# Altium PCB pay-ssm.PcbDoc (part 2 of 3)
Units mm, origin at the board's own origin, x right, y up, seen from the top; angles counter-clockwise.
Board outline 128 x 54 mm, 4 copper layers (Top Layer, GND, VCC, Bottom Layer), stack 0.778 mm thick; 199 components, 184 nets, 851 pads, 416 vias.
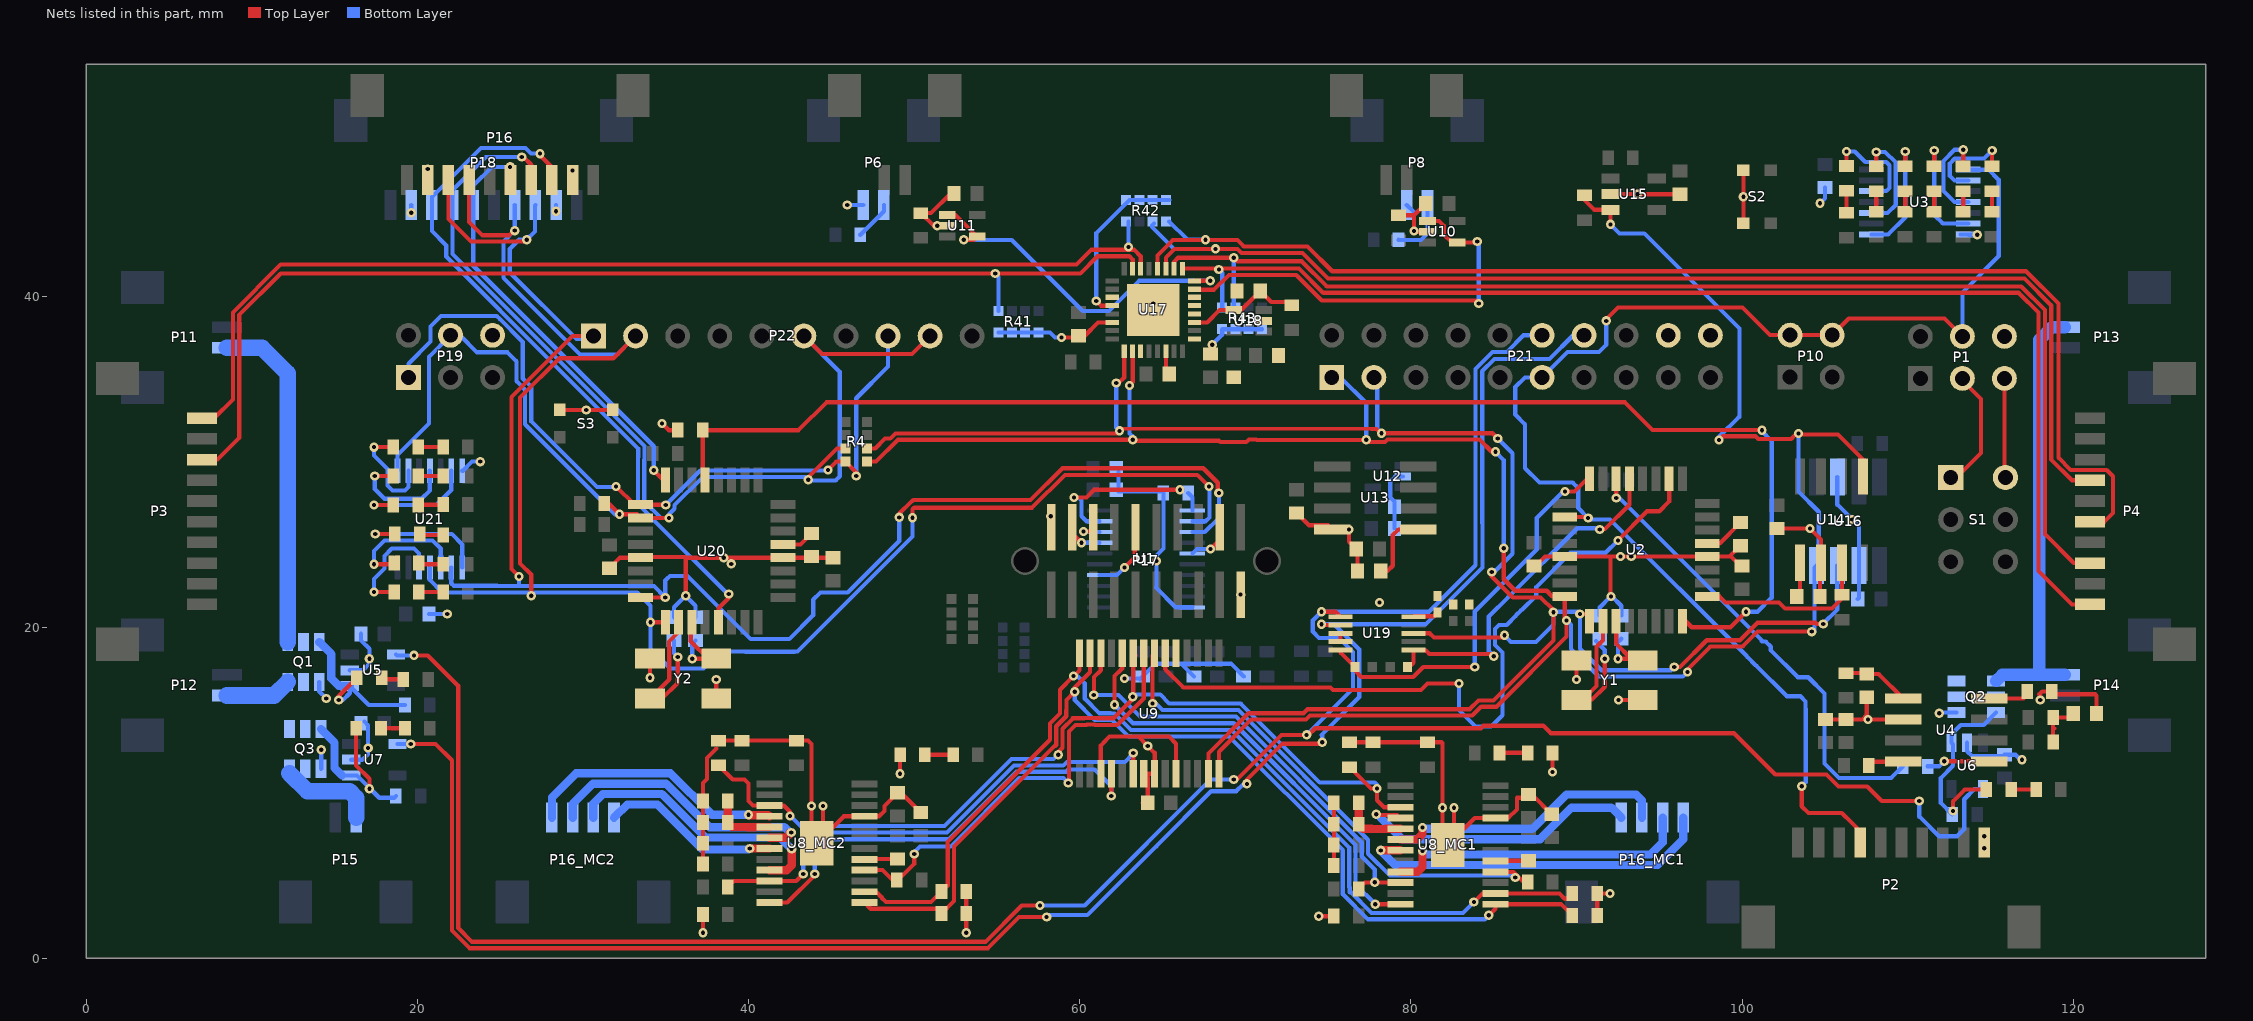
[diagram p4: the nets of this part, all layers, seen from the top]

## Via types
v1: diameter 0.559, hole 0.254, Top Layer to Bottom Layer, 376 vias
v2: diameter 1.5, hole 1.1, Top Layer to Bottom Layer, 32 vias
v3: diameter 6, hole 3.6, Top Layer to Bottom Layer, 8 vias

## Nets (pads, with @x,y where several pads share a name; then routed paths per layer and width w, separated by ;. In a path a pad name is that pad's centre, name@x,y a point inside that pad or via, vN(x,y) a via of type N, cw(c..) or ccw(c..) an arc to the next point about the centre after c; other vN are vias at no path point) (continued)
CH3: P3.8 R41.5 U17.15 | length 68.3
  Top Layer w0.254: P3.8@7,30.125 7.925,30.125 9.238,31.438 9.238,38.854 11.749,41.365 v1(54.9,41.365) 60.035,41.365 61.07,42.4 62.995,42.4 63.195,42.2 U17.15@63.195,41.655
  Bottom Layer w0.254: R41.5@55.1,39.1 55.1,41.165
CH4: P3.10 R42.8 U17.14 | length 66.6
  Top Layer w0.254: P3.10@7,32.625 7.736,32.625 8.857,33.746 8.857,39.012 11.743,41.899 59.81,41.899 60.712,42.8 v1@62.943,42.8 ; v1(62.943,42.957) v1@62.943,42.8 ; U17.14@63.677,41.655 63.677,42.4 63.277,42.8 v1@62.943,42.8
  Bottom Layer w0.254: v1(62.943,42.957) R42.8@62.943,44.5
CH6: P4.6 R42.5 U17.12 | length 76.7
  Top Layer w0.254: U17.12@64.693,41.655 64.693,42.454 65.621,43.382 69.526,43.382 69.908,43 73.75,43 75.25,41.5 76.6,41.5 117.141,41.5 119.1,39.541 119.1,30.24 119.84,29.5 122.018,29.5 122.4,29.118 122.4,26.9 121.875,26.375 P4.6@121,26.375
  Bottom Layer w0.254: R42.5@65.4,44.5 66.496,43.404 66.492,43.4 v1(67.593,43.4)
CH7: P4.4 R42.6 U17.11 | length 72.6
  Top Layer w0.254: U17.11@65.201,41.655 65.201,42.317 65.732,42.849 v1(68.2,42.849) 69.521,42.849 69.769,42.6 73.445,42.6 74.995,41.05 117.052,41.05 118.662,39.441 118.662,30.131 119.918,28.875 P4.4@121,28.875
  Bottom Layer w0.254: R42.6@64.48,44.38 64.361,44.261 64.361,44.174 65.687,42.849 v1(68.2,42.849)
CH8: P4.8 R43.6 U17.10 | length 74.5
  Top Layer w0.254: U17.10@65.684,41.655 65.684,42.065 65.934,42.315 v1(69.3,42.315) 69.515,42.1 73.4,42.1 74.919,40.581 76,40.581 116.858,40.581 118.281,39.158 118.281,25.619 120.025,23.875 P4.8@121,23.875
  Bottom Layer w0.254: v1(69.3,42.315) 69.3,39.4 R43.6@69.4,39.3
CH9: P4.10 R43.5 U17.9 | length 74.7
  Top Layer w0.254: U17.9@66.192,41.655 73.245,41.655 74.7,40.2 76,40.2 116.7,40.2 117.9,39 117.9,23.4 119.925,21.375 P4.10@121,21.375
  Bottom Layer w0.254: v1(68.4,41.6) 68.6,41.4 R43.5@68.6,39.3
CH10: U11.1 U11.4 U17.8 | length 21.6
  Top Layer w0.254: U11.1@52,44.9 52.5,44.9 U11.4@53.8,43.6 53.6,43.4 v1(53,43.4) ; U17.8@66.928,40.918 v1(67.882,40.918)
  Bottom Layer w0.254: v1(53,43.4) 53.011,43.389 55.889,43.389 60.178,39.1 61.764,39.1 63.582,40.918 v1(67.882,40.918)
CH11: U10.1 U10.4 U17.7 | length 25.9
  Top Layer w0.254: U17.7@66.928,40.41 66.954,40.385 68.115,40.385 69.004,41.274 73.072,41.274 74.615,39.731 83.925,39.731 v1(84.1,39.555) ; U10.1@81,44.528 81.7,44.528 81.977,44.251 81.977,43.723 82.472,43.228 U10.4@82.8,43.228 83.928,43.228 v1(84,43.3)
  Bottom Layer w0.254: v1(84,43.3) 84.1,43.2 v1(84.1,39.555)
CLKIN: P17.17 U1.5 | length 2.7
  Top Layer w0.254: v1(67.9,24.721) 68.445,25.266 P17.17@68.445,26.032
  Bottom Layer w0.254: U1.5@66.8,24.45 67.071,24.721 v1(67.9,24.721)
DAC_A: P21.12 U5.4 U6.4 U19.1 | length 161.6
  Top Layer w0.254: v1(19.8,18.3) 20.624,18.3 22.464,16.46 22.464,1.836 23.3,1 54.3,1 56.5,3.2 v1(57.6,3.2) ; v1(69.3,10.8) 69.319,10.8 69.4,10.719 72.181,13.5 v1(73.7,13.5) 73.819,13.5 74.219,13.9 84.234,13.9 84.39,14.056 87.991,14.056 88.447,13.6 99.5,13.6 102,11.1 105.092,11.1 105.811,10.381 107.558,10.381 108.433,9.506 v1@110.7,9.506 ; v1(74.6,20.933) 75.449,20.933 U19.1@75.75,20.632
  Bottom Layer w0.254: U5.4@18.716,18.349 18.764,18.3 v1(19.8,18.3) ; v1(57.6,3.2) 60.3,3.2 67.9,10.8 v1(69.3,10.8) ; v1(73.7,13.5) 76.5,16.3 76.5,18.5 75.648,19.352 74.448,19.352 74.067,19.733 74.067,20.4 v1(74.6,20.933) 81.095,20.933 83.9,23.739 83.9,35.6 84.925,36.625 85.796,36.625 86.8,37.629 P21.12@87.92,37.629 ; v1(110.7,9.5) 110.7,8.56 111.885,7.375 112.975,7.375 113.41,7.81 113.41,9.61 114.025,10.225 U6.4@114.538,10.225
DAC_B: P21.14 U7.4 U19.2 | length 112.6
  Top Layer w0.254: v1(19.6,12.95) 21.1,12.95 22.083,11.967 22.083,1.678 23.142,0.619 54.458,0.619 56.339,2.5 v1(58,2.5) ; v1(70.091,10.541) 70.091,10.809 72.248,12.967 74.556,12.967 v1(74.639,13.05) ; v1(74.6,20.174) 74.483,20.174 74.442,20.132 U19.2@75.75,20.132
  Bottom Layer w0.254: U7.4@18.8,12.95 v1(19.6,12.95) ; v1(58,2.5) 58,2.619 60.458,2.619 64.597,6.759 64.635,6.759 64.635,6.796 67.939,10.1 69.453,10.1 69.893,10.541 v1(70.091,10.541) ; v1(74.6,20.174) 75.458,20.174 ; v1(74.639,13.05) 74.639,13.461 74.6,13.5 76.881,15.781 76.881,18.658 75.458,20.081 75.458,20.174 ; P21.14@90.46,37.629 89.804,37.629 88.375,36.2 85.039,36.2 84.3,35.461 84.3,26.293 84.314,26.279 84.314,23.614 80.874,20.174 75.458,20.174
DAC_C\L\R\: R47.1 U2.32 U19.5 | length 24
  Top Layer w0.254: U19.5@75.75,18.632 75.75,18.462 R47.1@76.613,17.6 76.613,17.387 77,17 80.14,17 80.74,17.6 v1(83.852,17.6) ; v1(89.3,28.2) 89.877,28.2 ; 89.877,28.2 90.717,29.04 U2.32@90.793,28.965
  Bottom Layer w0.254: v1(83.852,17.6) 83.852,20.952 87.6,24.7 87.6,26.6 89.2,28.2 v1(89.3,28.2)
DAC_C\S\: R46.1 U2.29 U19.6 | length 22
  Top Layer w0.254: R46.1@79.8,17.6 79.901,17.6 80.15,17.849 U19.6@80.15,18.632 80.861,18.632 81.111,18.382 85.106,18.382 85,18.276 v1(85,18.247) ; v1@91.375,25.925 91.725,25.925 93.193,27.393 U2.29@93.193,28.965
  Bottom Layer w0.254: v1(85,18.247) 84.7,18.547 84.7,20.651 85.882,21.833 85.895,21.833 90.04,25.979 91.345,25.979 91.4,25.924 v1(91.4,25.9)
DATA_RDY: R51.2 U2.16 U20.29 | length 85.1
  Top Layer w0.254: U20.29@37.379,28.9 37.227,29.052 R51.2@37.227,31.9 43.019,31.9 44.7,33.581 92.919,33.581 94.586,31.914 101.186,31.914 v1(101.2,31.9) ; U2.16@96.393,20.365 96.594,20.365 96.959,20 99.3,20 v1(100.233,20.933)
  Bottom Layer w0.254: v1(100.233,20.933) 100.933,20.933 101.784,21.784 101.784,31.25 101.2,31.835 v1(101.2,31.9) v1@101.2,31.915
DECAY: R30_MC1.2 R30_MC2.2 U8_MC1.3 U8_MC2.3 U9.23 | length 55.9
  Top Layer w0.254: R30_MC2.2@38.194,11.656 39.044,10.806 39.747,10.806 39.997,10.556 39.997,9.506 40.272,9.231 U8_MC2.3@41.257,9.231 42.125,9.231 42.5,8.856 v1(42.5,8.6) ; v1(58.7,12.3) 58.7,12.461 58.962,12.723 58.962,13.865 59.562,14.465 59.562,14.5 60.269,14.5 60.284,14.514 61.041,14.514 61.056,14.5 62.035,14.5 63.2,15.665 v1(63.2,15.8) ; U9.23@63.228,18.418 63.358,18.288 63.228,18.157 63.228,17.127 63.233,17.121 v1@63.233,15.8 ; R30_MC1.2@76.294,11.55 77.589,10.256 v1(77.944,10.256) 77.944,9.553 78.372,9.125 U8_MC1.3@79.357,9.125
  Bottom Layer w0.254: v1(42.5,8.6) 42.538,8.6 43.138,8 51.839,8 55.873,12.034 58.418,12.034 58.684,12.3 v1(58.7,12.3) ; v1(63.2,15.8) 63.333,15.933 64.867,15.933 65.4,15.4 69.716,15.4 74.487,10.629 77.817,10.629 77.944,10.501 v1(77.944,10.256)
DIR_A: U8_MC1.12 U9.24 | length 27
  Top Layer w0.254: v1(62.1,15.319) 62.1,15.985 62.095,15.98 62.095,17.049 62.479,17.433 62.487,17.433 62.567,17.513 U9.24@62.567,18.418 ; v1(77.841,3.275) U8_MC1.12@79.357,3.275
  Bottom Layer w0.254: v1(62.1,15.319) 63.219,14.2 69.3,14.2 76.649,6.851 76.649,4.468 v1(77.841,3.275)
DIR_B: U8_MC2.12 U9.4 | length 27.1
  Top Layer w0.254: U8_MC2.12@41.257,3.381 42.335,3.381 44,5.046 v1(44,5.1) ; v1(61.907,9.807) U9.4@61.907,11.154
  Bottom Layer w0.254: v1(44,5.1) 44,6.35 44.85,7.2 52.116,7.2 56.188,11.272 59.165,11.272 59.293,11.4 60.9,11.4 61.907,10.393 v1(61.907,9.807)
E\N\_A: R23_MC1.1 U8_MC1.10 U9.26 | length 28.2
  Top Layer w0.254: v1(60.839,15.9) 60.839,15.794 60.867,15.767 60.867,16.994 61.272,17.399 U9.26@61.272,18.418 ; R23_MC1.1@76.85,4.2 77.225,4.575 U8_MC1.10@79.357,4.575
  Bottom Layer w0.254: v1(60.839,15.9) 62.346,15.9 63.646,14.6 69.439,14.6 77.03,7.009 77.03,6.16 77.817,5.374 v1(77.817,4.6)
E\N\_B: R23_MC2.1 U8_MC2.10 U9.6 | length 29.7
  Top Layer w0.254: R23_MC2.1@38.75,4.306 39.125,4.681 U8_MC2.10@41.257,4.681 42.881,4.681 v1(43.3,5.1) ; U9.6@63.228,11.154 v1(63.228,12.4)
  Bottom Layer w0.254: v1(43.3,5.1) 43.3,6.2 44.7,7.6 51.978,7.6 56.03,11.653 59.007,11.653 59.221,11.867 62.721,11.867 63.228,12.374 v1(63.228,12.4)
F\L\T\_A: R20_MC1.1 U8_MC1.16 U9.21 | length 32.4
  Top Layer w0.254: v1(64.4,15.4) 64.4,18.295 U9.21@64.523,18.418 ; U8_MC1.16@85.097,5.225 86.187,5.225 v1@86.412,5 ; v1(86.3,4.888) v1@86.412,5 ; v1@86.412,5 R20_MC1.1@86.794,4.619 ; R20_MC1.1@86.794,4.619 R20_MC1.1@87.05,4.619 R20_MC1.1@86.794,4.619
  Bottom Layer w0.254: v1(64.4,15.4) 64.6,15.4 65,15 69.578,15 77.411,7.167 77.411,6.318 78.729,5 86.188,5 v1(86.3,4.888)
F\L\T\_B: R20_MC2.1 U8_MC2.16 U9.22 | length 26.9
  Top Layer w0.254: U8_MC2.16@46.997,5.331 48.087,5.331 48.694,4.725 R20_MC2.1@48.95,4.725 49.025,4.725 50,5.7 v1(50,6.3) ; v1(59.3,10.6) 59.343,10.6 59.343,13.708 59.735,14.1 60.408,14.1 60.442,14.133 60.883,14.133 60.917,14.1 62.267,14.1 63.863,15.695 U9.22@63.863,18.418
  Bottom Layer w0.254: v1(50,6.3) 50,6.4 50.359,6.759 52.214,6.759 56.346,10.891 59.009,10.891 v1(59.3,10.6)
GND: C1.1 C2.1 C4.1 C5.1 C6.2 C7.1 C8.1 C9.1 C10.1 C11.1 C12.1 C13.2 C14.2 C15.2 C16_MC1.1 C16_MC2.1 C18_MC1.1 C18_MC2.1 C19.1 C20.1 C21.1 C22.1 C23.1 C24.1 C25.1 C26.1 C27.1 C28.1 C29.1 C30.1 C31.1 C32.1 C33.1 C34.1 C35.1 C36.1 C37.1 C38.1 C39.2 C42.1 C43.1 C44.1 C45.1 C62.1 C63.1 C64.2 D18_MC1.2 D18_MC2.2 P1.6 P2.1 P6.2 P8.2 P16.2 P16.9 P17.1 P17.20 P18.2 P18.9 P19.6 P21.18 P21.20 Q1.4 Q2.4 Q3.4 R3.1 R16.1 R21_MC1.1 R21_MC2.1 R22_MC1.1 R22_MC2.1 R24_MC1.1 R24_MC2.1 R25_MC1.1 R25_MC2.1 R26_MC1.1 R26_MC2.1 R27_MC1.1 R27_MC2.1 R28_MC1.1 R28_MC2.1 R29_MC1.1 R29_MC2.1 R30_MC1.1 R30_MC2.1 R31_MC1.1 R31_MC2.1 R35.1 R37.1 R39.1 R40.1 R41.1 R41.2 R41.3 R41.4 R42.1 R42.2 R42.3 R42.4 R43.1 R43.2 R43.3 R43.4 R44.2 R51.1 S2.2 S3.2 U1.10 U2.5 U2.20 U3.7 U4.2 U5.2 U6.2 U7.2 U8_MC1.21 U8_MC1.25 U8_MC2.21 U8_MC2.25 U9.3 U9.7 U9.8 U9.10 U10.2 U11.2 U12.2 U13.4 U14.2 U15.2 U16.2 U16.6 U17.1 U17.4 U17.5 U17.6 U17.19 U17.20 U17.22 U17.27 U17.30 U17.33 U18.2 U19.3 U19.4 U20.5 U20.20 U21.7 Y1.2 Y1.4 Y2.2 Y2.4 | length 245.5
  Top Layer w0.254: P16.2@20.625,47 v1(20.625,47.675) ; S3.2@28.6,33.125 v1(30.2,33.125) S3.2@31.8,33.125 ; P16.9@29.375,47 v1(29.375,47.575) ; C37.1@31.6,23.565 32.235,24.2 U20.5@33.479,24.2 33.513,24.233 36.167,24.233 36.2,24.2 ; v1(34.052,16.952) Y2.4@34.052,18.1 ; v1(34.777,32.3) 35.177,31.9 R51.1@35.728,31.9 ; v1(36.2,21.9) 36.2,24.2 ; v1(37.25,1.55) R29_MC2.1@37.25,2.657 ; R25_MC2.1@37.25,5.706 R26_MC2.1@37.25,6.956 R24_MC2.1@37.25,8.206 R27_MC2.1@37.25,9.506 37.25,10.6 37.49,10.84 37.49,12.111 38.052,12.673 ; Y2.2@38.052,15.7 v1(38.052,16.843) ; R30_MC2.1@38.194,13.156 R31_MC2.1@42.9,13.156 ; R31_MC2.1@42.9,13.156 43.594,13.156 43.8,12.95 v1(43.8,9.206) 43.8,7.484 44.497,8.181 v1(44.497,9.206) ; U8_MC2.25@44.127,6.956 45.752,8.581 U8_MC2.21@46.997,8.581 47.881,8.581 48.2,8.9 48.2,9.206 C18_MC2.1@49,10.006 49.2,10.006 C16_MC2.1@50.4,8.806 ; C38.1@45.1,24.2 U20.20@42.079,24.2 v1(38.5,24.2) 36.2,24.2 ; v1(49.15,11.15) D18_MC2.2@49.15,12.3 ; U11.2@52,44.25 v1(51.4,44.25) 51.161,44.25 R44.2@50.4,45.011 51.017,45.011 52.206,46.2 C21.1@52.4,46.2 ; v1(53.15,1.55) R21_MC2.1@53.15,2.7 R22_MC2.1@53.15,4.031 ; v1(58.9,37.5) 59.825,37.5 C33.1@59.925,37.6 60.3,37.6 61.104,38.404 U17.22@61.95,38.403 ; v1(61,39.7) 61.28,39.42 U17.20@61.95,39.419 ; U9.3@61.272,11.154 61.266,11.16 61.266,12.85 61.396,12.979 61.396,12.996 61.8,13.4 63.537,13.4 ; C19.1@63.8,9.4 64.1,9.7 64.1,10.917 U9.7@63.863,11.154 U9.8@64.523,11.154 64.523,12.414 v1(64.104,12.833) 63.537,13.4 ; v1(64.439,38.939) U17.33@64.439,39.165 v1(64.439,39.555) ; U17.30@65.201,36.676 65.201,35.599 C31.1@65.5,35.3 ; U9.10@65.819,11.154 65.819,12.962 65.381,13.4 63.537,13.4 ; C24.1@73.1,26.9 73.842,26.158 74.986,26.158 U13.4@75.241,25.902 v1(76.262,25.902) 76.262,25.159 C26.1@76.7,24.721 76.769,24.652 C25.1@76.769,23.4 ; v1(74.426,2.551) R29_MC1.1@75.35,2.551 ; R25_MC1.1@75.35,5.6 R26_MC1.1@75.35,6.85 R24_MC1.1@75.35,8.1 R27_MC1.1@75.35,9.4 ; U19.4@75.75,19.132 U19.3@75.75,19.632 ; R30_MC1.1@76.294,13.05 R31_MC1.1@81,13.05 ; R40.1@79.256,44.878 80.178,44.878 ; R31_MC1.1@81,13.05 81.85,13.05 81.9,13 v1(81.9,9.1) 81.9,7.378 82.597,8.075 v1(82.597,9.1) ; U10.2@81,43.878 80.222,43.878 v1(80.178,43.922) 80.178,44.878 ; C20.1@81.091,45.6 C20.1@80.9,45.6 80.178,44.878 ; U8_MC1.25@82.227,6.85 83.852,8.475 U8_MC1.21@85.097,8.475 85.871,8.475 86.396,9 86.396,9.704 87.1,9.704 C18_MC1.1@87.1,9.9 87.3,9.9 C16_MC1.1@88.5,8.7 ; C4.1@87.4,23.9 87.736,23.9 88.1,24.265 U2.5@89.293,24.265 92.05,24.265 ; v1(88.55,11.25) D18_MC1.2@88.55,12.4 ; v1(90,16.843) Y1.4@90,18 ; R21_MC1.1@91.25,2.594 R22_MC1.1@91.25,3.925 v1(92.023,3.925) ; U15.2@92.048,46.156 93.681,46.156 v1(93.688,46.149) C29.1@96.256,46.149 ; v1(92.075,21.85) 92.05,21.875 92.05,24.265 ; v1(92.53,15.6) Y1.2@94,15.6 ; C5.1@99.9,23.7 99.335,24.265 99.246,24.265 ; C6.2@99.9,24.919 99.246,24.265 ; S2.2@100.075,47.6 v1(100.075,46) 100.075,44.4 S2.2@100.1,44.4 ; C27.1@102.1,25.965 v1(104.094,25.965) 104.759,25.3 U14.2@104.759,23.9 104.7,23.841 C28.1@104.7,21.85 ; C9.1@105.027,14.431 C10.1@106.277,14.431 107.269,14.431 107.527,14.69 C12.1@107.527,15.774 ; v1(107.6,14.431) 109.717,14.431 U4.2@109.727,14.421 ; v1(114.625,6.656) v1(114.625,7.375) ; v1(118,15.6) 118,15.892 117.946,15.946 118.119,16.119 R16.1@118.708,16.119 118.882,15.946 121.319,15.946 121.4,15.865 C11.1@121.4,14.8 ; 92.05,24.265 v1(92.659,24.265) v1(93.302,24.265) U2.20@97.893,24.265 99.246,24.265
  Bottom Layer w0.254: Q1.4@14.075,16.7 14.075,16.125 v1(14.5,15.7) ; Q3.4@14.175,11.45 14.2,11.475 v1(14.2,12.6) ; U5.2@15.916,17.398 16.698,17.398 17.1,17.8 v1(17.1,18.1) 17.1,18.7 16.6,19.2 C13.2@16.6,19.6 ; U7.2@16,12 16.7,12 17.025,12.325 v1(17.025,12.7) 17.025,14.075 C14.2@16.8,14.3 ; v1(19.625,45.033) P18.9@19.625,45.5 ; C43.1@20.7,20.8 v1(21.8,20.8) ; U21.7@22.706,29.446 22.746,29.446 23.3,30 v1(23.8,30) ; v1(28.375,45.114) P18.2@28.375,45.5 ; C44.1@35.503,20.6 35.503,21.203 v1(36.2,21.9) 36.802,21.298 C45.1@36.802,20.6 ; v1(45.96,45.5) P6.2@46.92,45.5 ; R41.4@55.1,37.8 R41.3@55.9,37.8 R41.2@56.7,37.8 R41.1@57.5,37.8 58.2,37.8 58.5,37.5 v1(58.9,37.5) ; v1(61,39.7) 61,43.8 63,45.8 R42.2@63.6,45.8 R42.3@64.4,45.8 R42.4@65.2,45.8 R42.4@65.4,45.8 ; C2.1@62.339,29.5 62.339,28.2 64.95,28.2 R3.1@65.05,28.1 65.05,24.75 64.6,24.3 64.635,24.265 v1(64.635,24) 64.635,22.435 64.6,22.4 65.8,21.2 U1.10@66.8,21.2 ; v1(62.7,16.9) 63.6,16.9 63.638,16.862 R35.1@63.8,17.025 64.575,17.8 66.125,17.8 ; R37.1@66.9,17.025 66.125,17.8 ; v1(68,37.064) 68.6,37.664 R43.4@68.6,38 R43.3@69.4,38 R43.2@70.2,38 R43.1@71,38 ; R39.1@69.9,17.025 69.125,17.8 66.125,17.8 ; C23.1@79,25.965 C22.1@79,27.274 79,27.6 78.746,27.854 78.746,28.796 79.056,29.106 U12.2@79.5,29.106 ; P8.2@79.75,45.5 80.178,45.072 v1(80.178,43.922) v1@80.2,43.9 ; C8.1@91.4,20.7 91.4,21.2 92.05,21.85 v1(92.075,21.85) 92.15,21.85 92.7,21.3 C7.1@92.7,20.7 ; v1(104.7,45.6) 105,45.9 C42.1@105,46.55 ; U16.2@105.75,29.075 105.75,27.4 v1(106.65,26.5) 107.05,26.1 U16.6@107.05,23.725 107.05,21.769 C30.1@106.981,21.7 ; v1(111.9,14.8) 111.95,14.85 Q2.4@112.938,14.85 ; U3.7@113.183,43.719 U3.7@113.65,43.719 113.669,43.7 v1(114.204,43.7) ; U6.2@113.588,13.025 113.588,12.512 113.879,12.221 115.769,12.221 C15.2@115.848,12.3 116.5,12.3 116.8,12 v1(116.9,12)
  other v1: 78.1,21.5 69.715,21.968 38.959,23.826 58.25,26.7
HM_C\S\: R45.1 U2.17 U14.3 | length 10.9
  Top Layer w0.254: U2.17@97.893,21.865 98.635,21.865 99.002,21.498 102.234,21.498 102.6,21.132 105.432,21.132 106.029,21.729 R45.1@106.029,21.95 U14.3@106.029,23.9
INTA: U2.26 U9.20 | length 45.1
  Top Layer w0.254: U9.20@65.158,18.418 65.158,17.463 66.255,16.366 ; 66.256,16.366 75.134,16.366 75.3,16.2 80.6,16.2 81,16.6 v1(82.9,16.6) ; v1(92.5,25.244) 94.256,27 95,27 95.593,27.593 U2.26@95.593,28.965
  Bottom Layer w0.254: v1(82.9,16.6) 82.9,15 83.9,14 84.85,14 85.533,14.684 85.533,18.467 85.081,18.92 85.081,19.9 85.313,20.132 85.786,20.132 86.352,20.698 86.352,20.721 86.665,21.033 86.688,21.033 87.572,21.918 87.572,22.433 89.639,24.5 91.756,24.5 v1(92.5,25.244)
INTB: U9.19
LBK: R14.2 U2.30 | length 28.4
  Top Layer w0.254: v1(92.393,27.807) U2.30@92.393,28.965
  Bottom Layer w0.254: v1(92.393,27.807) 92.593,27.807 101.172,19.228 101.172,19.167 101.205,19.133 101.421,19.133 101.733,18.821 101.733,18.606 103.362,16.976 103.994,16.976 104.981,15.99 104.981,11.769 105.85,10.9 109,10.9 R14.2@109.7,11.6
LED_CLK: P16.7 P18.7 P19.4 P22.6 P22.9 R4.7 R22.1 U20.2 U21.1 | length 95.4
  Top Layer w0.254: v1(26.3,48.4) 26.4,48.4 26.875,47.925 P16.7@26.875,47 ; R22.1@31.296,27.465 31.556,27.465 v1(32.2,26.821) 33.258,26.821 U20.2@33.479,26.6 v1(35.2,26.6) ; P22.6@43.34,37.588 44.428,36.5 49.872,36.5 P22.9@50.96,37.588 ; v1(43.6,28.9) 43.6,29.043 43.594,29.048 45.346,30.8 R4.7@45.85,30.8
  Bottom Layer w0.254: U21.1@18.794,29.446 18.794,30.394 20.7,32.3 20.7,36.329 P19.4@22,37.629 22.571,37.629 23.6,36.6 25.439,36.6 25.981,36.058 25.981,34.858 26.5,34.339 26.5,32.261 31.94,26.821 v1(32.2,26.821) ; v1(26.3,48.4) 24.133,48.4 22.125,46.392 P18.7@22.125,45.5 22.125,42.542 33.714,30.952 33.714,30.121 33.7,30.107 33.7,27.6 34.7,26.6 v1(35.2,26.6) 35.2,26.821 35.533,27.154 35.533,27.37 37.24,29.076 43.424,29.076 v1(43.6,28.9) 43.633,28.867 45.26,28.867 45.506,29.112 45.506,35.422 P22.6@43.34,37.588
LED_PEX_C\S\: P16.6 P18.6 U20.32 | length 25.3
  Top Layer w0.254: v1(34.275,29.475) 34.85,28.9 U20.32@34.979,28.9
  Bottom Layer w0.254: v1(25.6,47.8) 24.5,47.8 23.375,46.675 P18.6@23.375,45.5 23.375,41.83 34.275,30.93 v1(34.275,29.475)
LED_PEX_R\S\T\: P16.8 P18.8 U20.13 | length 43.3
  Top Layer w0.254: v1(27.4,48.6) 27.3,48.6 28.125,47.775 P16.8@28.125,47 ; U20.13@38.179,20.3 38.179,21.145 38.8,21.766 v1(38.8,22)
  Bottom Layer w0.254: v1(27.4,48.6) 26.854,48.6 26.521,48.933 23.833,48.933 20.875,45.975 P18.8@20.875,45.5 20.875,43.925 21.744,43.056 21.744,42.384 24.944,39.184 24.944,39.181 25.111,39.014 25.114,39.014 33.333,30.794 33.333,30.279 33.319,30.265 33.319,27.442 34.3,26.461 34.3,26.446 38.746,22 v1(38.8,22)
M0: R21_MC1.2 R21_MC2.2 U8_MC1.13 U8_MC2.13 U9.27 | length 62.8
  Top Layer w0.254: U8_MC2.13@46.997,3.381 47.378,3 51.35,3 R21_MC2.2@51.65,2.7 52.41,3.46 52.41,6.764 58.479,12.833 58.533,12.833 58.581,12.881 58.581,14.023 59.181,14.623 59.181,14.981 59.2,15 59.2,15.6 v1(59.7,16.1) 59.7,16.366 60.612,17.277 U9.27@60.612,18.418 ; v1(84.7,2.6) 85.097,2.997 U8_MC1.13@85.097,3.275 89.069,3.275 R21_MC1.2@89.75,2.594
  Bottom Layer w0.254: v1(59.7,16.1) 59.7,15.6 60.9,14.4 61.941,14.4 62.903,13.438 62.923,13.438 62.942,13.419 63.076,13.419 63.095,13.4 69.022,13.4 75.887,6.535 75.887,3.874 77.4,2.361 84.461,2.361 v1(84.7,2.6)
M1: R22_MC1.2 R22_MC2.2 U8_MC1.14 U8_MC2.14 U9.28 | length 61.9
  Top Layer w0.254: U8_MC2.14@46.997,4.031 47.696,4.031 48.036,3.691 48.036,3.664 48.3,3.4 51.019,3.4 R22_MC2.2@51.65,4.031 52.029,4.41 52.029,6.861 52.019,6.871 52.019,7.025 58.2,13.206 58.2,14.181 58.8,14.781 58.8,16.221 v1(59.628,17.049) 59.977,17.398 U9.28@59.977,18.418 ; v1(83.8,3.4) 84.315,3.915 88.968,3.915 89.283,3.6 89.425,3.6 R22_MC1.2@89.739,3.915 ; R22_MC1.2@89.739,3.915 R22_MC1.2@89.75,3.925 R22_MC1.2@89.739,3.915
  Bottom Layer w0.254: v1(59.628,17.049) 59.851,17.049 60.306,16.594 60.306,15.679 61.185,14.8 61.865,14.8 61.879,14.786 62.095,14.786 63.061,13.819 63.081,13.819 63.1,13.8 69.161,13.8 76.268,6.693 76.268,4.31 76.3,4.278 76.3,4 76.362,4 77.62,2.742 83.142,2.742 v1(83.8,3.4)
MISO: P21.1 R4.1 R55.2 U2.8 U9.14 U14.5 U15.3 U16.8 U17.26 | length 151.3
  Top Layer w0.254: R4.1@47.15,30 47.7,30 49.024,31.324 v1(63.2,31.324) 63.268,31.256 68.41,31.256 68.485,31.181 70.06,31.181 70.212,31.333 70.654,31.333 70.683,31.304 77.128,31.304 77.251,31.181 78.435,31.181 78.588,31.333 79.918,31.333 79.921,31.33 80.679,31.33 80.682,31.333 84.147,31.333 84.881,30.6 v1(85.1,30.6) ; v1@63.195,34.8 U17.26@63.195,36.676 ; U9.14@68.409,11.154 68.409,12.478 70.352,14.421 73.663,14.421 73.903,14.662 83.703,14.662 84.24,15.199 85.165,15.199 89.4,19.433 v1(89.4,20.4) 89.293,20.507 U2.8@89.293,21.865 88.535,21.865 88.2,22.2 86.3,22.2 85.605,22.895 85.605,23.295 85.6,23.3 v1(85.6,24.77) ; v1@77.15,31.333 77.16,31.324 v1(77.3,31.324) ; R55.2@90.481,46.074 90.481,45.8 91.075,45.206 U15.3@92.048,45.206 v1(92.048,44.328) ; v1(96.7,17.3) 96.7,17.454 98.079,18.833 100.033,18.833 100.933,19.733 v1(104.199,19.733) ; v1(98.6,31.3) 98.833,31.533 100.812,31.533 100.979,31.367 102.965,31.367 v1@103.2,31.601 ; v1@103.232,31.633 105.794,31.633 107.299,30.128 U14.5@107.299,29.1
  Bottom Layer w0.254: v1(63,34.6) 63,31.7 63.2,31.5 v1(63.2,31.324) ; P21.1@75.22,35.089 75.752,35.089 77.3,33.541 v1(77.3,31.324) ; v1(85.1,30.6) 85.6,30.1 v1(85.6,24.77) ; v1(89.4,20.4) 89.413,20.4 89.667,20.146 89.667,18.695 91.342,17.019 96.419,17.019 v1(96.7,17.3) ; v1(92.048,44.328) 92.595,43.781 94.094,43.781 99.838,38.037 99.838,32.7 99.8,32.7 98.6,31.5 v1(98.6,31.3) ; v1(103.4,31.7) 103.4,28.2 104.628,26.972 104.628,23.853 U16.8@104.5,23.725 104.367,23.592 104.367,19.733 v1(104.199,19.733)
MISO_32M1: P16.3 P18.3 P22.1 U1.3 U20.8 U21.9 | length 99.6
  Top Layer w0.254: P16.3@21.875,47 21.875,44.644 23.233,43.286 26.486,43.286 v1(26.6,43.4) ; v1(26.138,23.062) 25.681,23.519 25.681,33.894 29.375,37.588 P22.1@30.64,37.588 ; U20.8@33.479,21.8 v1(34.969,21.8) ; v1(49.1,26.634) 49.1,26.858 49.842,27.6 49.859,27.6 49.94,27.682 57.032,27.682 58.95,29.6 67.454,29.6 68.333,28.721 68.333,28.167 v1(68.4,28.1)
  Bottom Layer w0.254: U21.9@22.045,23.604 22.045,22.655 22.2,22.5 24.807,22.5 24.826,22.481 26.119,22.481 ; v1(26.138,23.062) 26.138,22.5 26.119,22.481 ; P18.3@27.125,45.5 27.1,45.475 27.1,43.9 v1(26.6,43.4) 26.138,43.4 25.581,42.843 25.581,41.419 29.6,37.4 29.975,37.4 30.163,37.588 P22.1@30.64,37.588 ; v1(34.969,21.8) v1@34.967,21.803 ; v1(49.1,26.634) 49.1,25.212 45.988,22.1 44.343,22.1 43.9,21.657 43.9,20.72 42.461,19.281 40.126,19.281 36.307,23.1 35.254,23.1 35.121,22.967 35.117,22.967 34.967,22.817 v1@34.967,21.803 ; U1.3@66.8,25.75 67.55,25.75 68.4,26.6 v1(68.4,28.1) ; 26.119,22.481 34.288,22.481 v1@34.967,21.803
MISO_A: P19.1 P22.8 R4.8 U20.1 | length 47.7
  Top Layer w0.254: v1(32,28.5) 33.1,27.4 U20.1@33.479,27.4 v1@35,27.4 ; v1(44.8,29.5) 45.3,30 R4.8@45.85,30 46.5,29.35 v1(46.5,29.125)
  Bottom Layer w0.254: P19.1@19.46,35.089 19.46,35.91 20.8,37.25 20.8,38.168 21.432,38.8 24.786,38.8 24.953,38.633 24.956,38.633 26.362,37.227 26.362,35.016 26.881,34.497 26.881,32.418 30.839,28.46 31.96,28.46 v1(32,28.5) ; v1(35,27.375) 37.082,29.457 44.757,29.457 v1(44.8,29.5) ; v1(46.5,29.125) 46.5,33.83 48.42,35.75 P22.8@48.42,37.588
MISO_IN: P17.3 U1.17 | length 2.1
  Top Layer w0.254: P17.3@59.555,26.032 59.555,25.645 v1(60.1,25.1)
  Bottom Layer w0.254: v1(60.1,25.1) U1.17@61.08,25.1
MOSI: P21.3 R4.2 U2.9 U9.13 U16.7 U17.25 U19.8 | length 123.3
  Top Layer w0.254: R4.2@47.15,30.8 47.647,30.8 48.247,31.4 48.561,31.4 48.866,31.705 62.247,31.705 v1(62.4,31.858) ; v1(62.2,34.749) 62.349,34.749 62.687,35.087 U17.25@62.687,36.676 ; v1@62.45,32 77.6,31.962 77.925,31.962 78.172,31.714 v1(78.214,31.714) 80.076,31.714 80.079,31.711 80.521,31.711 80.524,31.714 84.928,31.714 v1(85.242,31.4) ; U9.13@67.774,11.154 67.774,12.382 70.194,14.802 73.505,14.802 73.746,15.043 83.545,15.043 84.082,15.58 84.98,15.58 88.6,19.2 v1(88.6,20.9) 88.6,21.032 87.832,21.8 86.146,21.8 84.881,23.065 v1(84.881,23.333) ; U19.8@80.15,19.632 81.133,19.632 81.383,19.382 85.746,19.382 85.631,19.497 v1(85.648,19.515) ; v1(90.2,20.8) 90.73,20.8 90.793,20.737 U2.9@90.793,20.365 ; v1(95.9,17.6) 96.246,17.6 97.86,19.214 99.876,19.214 100.928,20.267 101.944,20.267 102.386,20.267 104.42,20.267 104.487,20.2 v1(104.9,20.2)
  Bottom Layer w0.254: v1(62.2,34.749) 62.2,32.058 v1(62.4,31.858) ; P21.3@77.76,35.089 77.967,34.882 77.967,31.962 v1(78.214,31.714) ; v1(84.881,23.333) 85.033,23.333 86.133,24.433 86.133,30.509 v1(85.242,31.4) ; v1(85.648,19.515) 85.648,19.497 86.033,19.113 87.556,19.113 88.6,20.157 v1(88.6,20.9) 88.633,20.933 90.067,20.933 v1(90.2,20.8) 90.2,18.7 91.5,17.4 95.7,17.4 v1(95.9,17.6) ; v1(104.9,20.2) 104.9,20.219 105.75,21.069 U16.7@105.75,23.725
MOSI_32M1: P16.4 P18.4 P22.2 U1.2 U20.9 U21.11 | length 103.2
  Top Layer w0.254: P16.4@23.125,47 23.125,44.475 23.933,43.667 25.525,43.667 25.808,43.95 v1(25.875,43.95) ; v1(26.875,21.906) 26.875,23.175 26.2,23.85 26.2,33.874 28.564,36.238 31.83,36.238 P22.2@33.18,37.588 ; v1(34.077,20.3) U20.9@34.979,20.3 ; v1(49.9,26.61) 49.9,27.119 50,27.219 57.119,27.219 59.101,29.201 67.099,29.201 67.26,29.04 v1(67.8,28.5)
  Bottom Layer w0.254: U21.11@20.75,23.604 20.75,22.85 21.5,22.1 v1@26.875,22.1 ; P18.4@25.875,45.5 v1(25.875,43.95) 25.2,43.275 25.2,41.1 29.828,36.472 32.065,36.472 P22.2@33.18,37.588 ; v1(26.875,21.906) 27.069,22.1 33.275,22.1 34.077,21.298 v1(34.077,20.3) 34.077,18.689 35.267,17.5 37.275,17.5 38.3,18.525 39.804,18.525 39.81,18.519 42.777,18.519 42.783,18.525 42.952,18.525 49.9,25.473 v1(49.9,26.61) ; U1.2@66.8,26.4 67.6,26.4 67.829,26.629 67.829,28.471 v1(67.8,28.5)
MOSI_A: P1.4 P2.7 P10.2 P10.4 P21.11 U2.2 U3.1 | length 85.3
  Top Layer w0.254: U2.2@89.293,26.665 90.635,26.665 v1(90.7,26.6) ; v1(91.8,38.5) 91.8,38.614 92.5,39.314 100.014,39.314 101.689,37.64 P10.2@102.9,37.64 P10.4@105.44,37.64 106.441,38.641 112.224,38.641 P1.4@113.3,37.565 ; v1(103.594,10.394) 103.594,9.187 104,8.781 106.019,8.781 106.6,8.2 107.1,7.7 107.1,7.025 P2.7@107.125,7
  Bottom Layer w0.254: v1(91.8,38.5) 91.8,37.064 91.361,36.625 89.456,36.625 P21.11@87.92,35.089 86.889,35.089 86.3,34.5 86.3,32.839 86.886,32.253 86.886,32.221 86.895,32.211 86.895,29.6 87.762,28.733 89.767,28.733 90.1,28.4 90.1,27.2 v1(90.7,26.6) 90.788,26.512 92.02,26.512 100.285,18.247 100.285,18.221 100.821,17.686 100.846,17.686 102.699,15.833 103.521,15.833 103.833,15.521 103.833,15.079 103.838,15.079 103.838,10.638 v1(103.594,10.394) ; P1.4@113.3,37.565 113.3,40.222 115.499,42.421 115.499,47.019 114.887,47.63 U3.1@113.65,47.63
MOSI_IN: P17.5 U1.18 | length 1.7
  Top Layer w0.254: v1(60.227,25.786) 60.561,25.786 60.57,25.777 P17.5@60.825,26.032
  Bottom Layer w0.254: v1(60.227,25.786) 60.2,25.759 61.191,25.759 U1.18@61.2,25.75
MUX_5_EN: P17.9 U1.14 | length 4.4
  Top Layer w0.254: v1(62.7,23.6) 63.319,24.219 63.319,25.986 P17.9@63.365,26.032
  Bottom Layer w0.254: U1.14@61.2,23.15 62.25,23.15 v1(62.7,23.6)
NetC6_1: C6.1 U2.21 | length 2.5
  Top Layer w0.254: U2.21@97.893,25.065 98.646,25.065 C6.1@99.9,26.319
NetC7_2: C7.2 U2.11 Y1.3 | length 5.5
  Top Layer w0.254: U2.11@92.393,20.365 92.393,19.007 Y1.3@93.277,18.123 ; v1(92.5,18.1) 93.254,18.1 Y1.3@93.277,18.123 ; Y1.3@93.968,18.04 93.885,18.123 Y1.3@93.277,18.123
  Bottom Layer w0.254: v1(92.5,18.1) 92.5,18.885 92.393,18.993 C7.2@92.7,19.3
NetC8_2: C8.2 U2.10 Y1.1 | length 10.3
  Top Layer w0.254: Y1.1@89.968,15.64 Y1.1@90.39,15.64 ; U2.10@91.593,20.365 91.593,19.216 91.2,18.824 91.2,16.45 Y1.1@90.39,15.64 ; v1(91.7,18.1) 91.7,16.4 90.94,15.64 Y1.1@90.39,15.64
  Bottom Layer w0.254: C8.2@91.167,19.165 91.7,18.631 v1(91.7,18.1)
NetC11_2: C11.2 R12.2 R15.2 | length 2.9
  Top Layer w0.254: R12.2@118.777,13.077 118.777,13.81 ; 118.844,13.877 118.777,13.81 ; C11.2@120,14.8 119.744,14.544 R15.2@118.777,14.544 118.777,13.81
NetC12_2: C12.2 R13.1 U4.1 | length 4.1
  Top Layer w0.254: R13.1@106.277,17.231 107.47,17.231 C12.2@107.527,17.174 108.244,17.174 U4.1@109.727,15.691
NetC17_MC1_1: C17_MC1.1 U8_MC1.17 | length 4
  Top Layer w0.254: U8_MC1.17@85.097,5.875 U8_MC1.17@85.122,5.9 ; U8_MC1.17@85.122,5.9 C17_MC1.1@87.097,5.9 U8_MC1.17@85.122,5.9
NetC17_MC2_1: C17_MC2.1 U8_MC2.17 | length 2
  Top Layer w0.254: U8_MC2.17@46.997,5.981 47.022,6.006 C17_MC2.1@48.997,6.006
NetC25_2: C25.2 U13.5 | length 4.4
  Top Layer w0.254: C25.2@78.169,23.4 78.586,23.4 78.9,23.714 78.9,25.565 79.238,25.902 U13.5@80.441,25.902
NetC28_2: C28.2 U14.1 | length 2.1
  Top Layer w0.254: C28.2@103.3,21.85 103.489,22.039 U14.1@103.489,23.9
NetC36_2: C36.2 R50.2 U17.3 U18.4 | length 7.1
  Top Layer w0.254: U17.3@66.928,38.403 67.7,38.404 68.447,39.15 U18.4@69.3,39.15 69.75,39.15 C36.2@70.9,40.3 71.561,39.639 72.8,39.639 R50.2@72.8,39.45
NetC39_1: C39.1 U20.21 | length 2
  Top Layer w0.254: U20.21@42.079,25 43.135,25 C39.1@43.8,25.665
NetC44_2: C44.2 U20.10 Y2.1 | length 10
  Top Layer w0.254: U20.10@35.677,20.325 35.677,19.614 35.2,19.137 35.2,18.812 35.206,18.805 35.206,16.854 Y2.1@34.052,15.7 34.777,15.7 35.728,16.65 v1(35.728,18.2)
  Bottom Layer w0.254: C44.2@35.503,19.2 35.503,18.425 v1(35.728,18.2)
NetC45_2: C45.2 U20.11 Y2.3 | length 5.3
  Top Layer w0.254: U20.11@36.478,20.325 36.503,20.3 36.503,19.15 Y2.3@37.552,18.1 ; v1(36.602,18.1) Y2.3@37.552,18.1 ; Y2.3@38.052,18.1 Y2.3@37.552,18.1
  Bottom Layer w0.254: v1(36.602,18.1) 36.602,19 C45.2@36.802,19.2
NetC64_1: C64.1 U19.10 | length 1.6
  Top Layer w0.254: U19.10@80.15,20.632 80.183,20.665 81.383,20.665 C64.1@81.6,20.882
NetD1_1: D1.1 R6.2 | length 1.2
  Top Layer w0.254: R6.2@115.097,45.08 D1.1@115.097,46.33
NetD1_2: D1.2 U3.2 | length 5.8
  Top Layer w0.254: D1.2@115.097,47.83 v1(115.097,48.788)
  Bottom Layer w0.254: U3.2@113.65,46.97 112.83,46.97 112.543,47.257 112.543,48.004 112.838,48.299 113.568,48.299 113.569,48.3 114.609,48.3 v1(115.097,48.788)
NetD2_1: D2.1 R7.2 | length 1.2
  Top Layer w0.254: R7.2@113.347,45.08 D2.1@113.347,46.33
NetD2_2: D2.2 U3.4 | length 6.1
  Top Layer w0.254: D2.2@113.347,47.83 v1(113.347,48.832)
  Bottom Layer w0.254: v1(113.347,48.832) 112.832,48.832 112.162,48.162 112.162,46.338 112.825,45.675 U3.4@113.65,45.675
NetD3_1: D3.1 R8.2 | length 1.2
  Top Layer w0.254: R8.2@111.597,45.08 D3.1@111.597,46.33
NetD3_2: D3.2 U3.6 | length 7.1
  Top Layer w0.254: D3.2@111.597,47.83 v1(111.597,48.782)
  Bottom Layer w0.254: v1(111.597,48.782) 111.597,44.903 112.121,44.379 U3.6@113.65,44.379
NetD4_1: D4.1 R9.2 | length 1.2
  Top Layer w0.254: R9.2@109.847,45.08 D4.1@109.847,46.33
NetD4_2: D4.2 U3.8 | length 7.4
  Top Layer w0.254: D4.2@109.847,47.83 v1(109.847,48.732)
  Bottom Layer w0.254: U3.8@107.808,43.719 108.819,43.719 109.847,44.747 v1(109.847,48.732)
NetD5_1: D5.1 R10.2 | length 1.2
  Top Layer w0.254: R10.2@108.097,45.08 D5.1@108.097,46.33
NetD5_2: D5.2 U3.10 | length 6.6
  Top Layer w0.254: D5.2@108.097,47.83 v1(108.097,48.705)
  Bottom Layer w0.254: U3.10@107.808,45.014 108.786,45.014 109.281,45.509 109.281,48.058 108.634,48.705 v1(108.097,48.705)
NetD6_1: D6.1 R57.2 | length 1.5
  Top Layer w0.254: D6.1@20.054,30.875 R57.2@21.55,30.875
NetD6_2: D6.2 U21.2 | length 6.3
  Top Layer w0.254: v1(17.375,30.875) D6.2@18.554,30.875
  Bottom Layer w0.254: v1(17.375,30.875) 17.375,30.375 18.2,29.55 18.2,28.55 18.5,28.25 19.25,28.25 19.46,28.46 19.46,29.441 U21.2@19.455,29.446
NetD7_1: D7.1 R59.2 | length 1.5
  Top Layer w0.254: D7.1@20.054,29.125 R59.2@21.55,29.125
NetD7_2: D7.2 U21.4 | length 6.9
  Top Layer w0.254: v1(17.425,29.125) D7.2@18.554,29.125
  Bottom Layer w0.254: v1(17.425,29.125) 17.425,28.345 18.014,27.756 20.256,27.756 20.75,28.25 U21.4@20.75,29.446
NetD8_1: D8.1 R61.2 | length 1.5
  Top Layer w0.254: D8.1@20.054,27.375 20.079,27.4 R61.2@21.55,27.4
NetD8_2: D8.2 U21.6 | length 7.4
  Top Layer w0.254: v1(17.375,27.375) D8.2@18.554,27.375
  Bottom Layer w0.254: v1(17.375,27.375) 21.125,27.375 22.045,28.295 U21.6@22.045,29.446
NetD9_1: D9.1 R62.2 | length 1.4
  Top Layer w0.254: D9.1@20.144,25.625 20.194,25.575 R62.2@21.55,25.575
NetD9_2: D9.2 U21.8 | length 8.1
  Top Layer w0.254: v1(17.45,25.625) D9.2@18.644,25.625
  Bottom Layer w0.254: v1(17.45,25.625) 22.081,25.625 22.706,25 U21.8@22.706,23.604
NetD10_1: D10.1 R63.2 | length 1.5
  Top Layer w0.254: D10.1@20.094,23.875 20.169,23.8 R63.2@21.55,23.8
NetD10_2: D10.2 U21.10 | length 7.7
  Top Layer w0.254: v1(17.375,23.8) 18.519,23.8 D10.2@18.594,23.875
  Bottom Layer w0.254: v1(17.375,23.8) 17.375,24.611 18.008,25.244 20.916,25.244 21.41,24.75 U21.10@21.41,23.604
NetD11_1: D11.1 R64.2 | length 1.3
  Top Layer w0.254: R64.2@106.3,45.029 D11.1@106.3,46.35
NetD11_2: D11.2 U3.12 | length 6.4
  Top Layer w0.254: D11.2@106.3,47.85 v1(106.3,48.732)
  Bottom Layer w0.254: v1(106.3,48.732) 106.8,48.732 107.432,48.1 108.7,48.1 108.9,47.9 108.9,46.531 108.704,46.335 U3.12@107.808,46.335
NetD12_1: D12.1 R65.2 | length 1.5
  Top Layer w0.254: D12.1@20.094,22.125 R65.2@21.55,22.125
NetD12_2: D12.2 U21.12 | length 6.9
  Top Layer w0.254: v1(17.375,22.125) D12.2@18.594,22.125
  Bottom Layer w0.254: v1(17.375,22.125) 17.375,22.91 18.008,23.544 18.008,24.308 18.45,24.75 19.79,24.75 20.09,24.45 U21.12@20.09,23.604
NetD15_1: D15.1 R68.1 | length 1.5
  Top Layer w0.254: D15.1@116.25,10.2 R68.1@117.75,10.2
NetD15_2: D15.2 Q2.3 R18.1 U6.1 | length 11.6
  Top Layer w0.254: v1(112.733,8.9) 112.733,9.486 113.448,10.2 D15.2@114.75,10.2
  Bottom Layer w0.254: R18.1@112.688,8.7 112,9.388 112,10.9 112.733,11.633 112.733,12.93 U6.1@112.638,13.025 112.638,13.538 113.2,14.1 114.588,14.1 Q2.3@115.338,14.85
NetD16_1: D16.1 R69.1 | length 1.3
  Top Layer w0.254: D16.1@17.85,16.95 17.946,16.854 R69.1@19.15,16.854
NetD16_2: D16.2 Q1.3 R17.1 U5.1 | length 10.7
  Top Layer w0.254: v1(15.25,15.6) 15.25,15.85 D16.2@16.35,16.95
  Bottom Layer w0.254: v1(15.25,15.6) 15.5,15.6 15.916,16.016 U5.1@15.916,16.448 16.565,15.8 17.065,15.3 R17.1@19.25,15.3
  Bottom Layer w0.5: Q1.3@14.075,19.1 14.8,18.375 14.8,16.9 15.251,16.448 U5.1@15.916,16.448
NetD17_1: D17.1 R70.1 | length 1.4
  Top Layer w0.254: D17.1@17.8,13.9 R70.1@19.25,13.9
NetD17_2: D17.2 Q3.3 R19.1 U7.1 | length 11.2
  Top Layer w0.254: D17.2@16.3,13.9 16.3,11.65 17.1,10.85 v1(17.1,10.25)
  Bottom Layer w0.254: 15.45,11.05 U7.1@16,11.05 16.35,11.05 17.7,9.7 18.6,9.7 R19.1@18.7,9.8
  Bottom Layer w0.5: Q3.3@14.175,13.85 15,13.025 15,11.5 15.45,11.05
NetD18_MC1_1: D18_MC1.1 R71_MC1.1 | length 1.7
  Top Layer w0.254: R71_MC1.1@85.35,12.415 87.035,12.415 D18_MC1.1@87.05,12.4
NetD18_MC2_1: D18_MC2.1 R71_MC2.1 | length 1.7
  Top Layer w0.254: D18_MC2.1@50.65,12.3 R71_MC2.1@52.35,12.3
NetP1_3: P1.3 S1.1 | length 7.4
  Top Layer w0.254: S1.1@112.599,29.04 112.94,29.04 114.419,30.519 114.419,33.781 113.3,34.9 P1.3@113.3,35.025
NetP1_5: P1.5 S1.4 | length 6
  Top Layer w0.254: P1.5@115.84,35.025 115.84,29.101 S1.4@115.901,29.04
NetP6_1: P6.1 R1.2 | length 2.4
  Bottom Layer w0.254: R1.2@46.75,43.7 48.17,45.12 P6.1@48.17,45.5
NetP8_1: P8.1 R2.2 | length 3.6
  Bottom Layer w0.254: R2.2@79.25,43.4 79.261,43.389 80.608,43.389 81,43.781 P8.1@81,45.5
NetP11_2: P11.2 P12.2 Q1.1 Q1.2 Q1.5 Q1.6 | length 24.6
  Bottom Layer w1: P12.2@8.5,15.875 11.35,15.875 Q1.6@12.175,16.7 ; P11.2@8.5,36.875 10.625,36.875 12.175,35.325 Q1.1@12.175,19.1
NetP13_2: P13.2 P14.2 Q2.1 Q2.2 Q2.5 Q2.6 | length 26.4
  Bottom Layer w0.75: Q2.1@115.338,16.75 115.713,17.125 117.95,17.125 ; P14.2@119.5,17.125 117.95,17.125 ; P13.2@119.5,38.125 118.725,38.125 117.95,37.35 117.95,17.125
NetP15_2: P15.2 Q3.1 Q3.2 Q3.5 Q3.6 | length 6.1
  Bottom Layer w0.254: Q3.6@12.275,11.175 Q3.6@12.275,11.45
  Bottom Layer w1: Q3.6@12.275,11.175 13.35,10.1 15.9,10.1 16.3,9.7 P15.2@16.3,8.5
NetP16_MC1_1: P16_MC1.1 U8_MC1.4 | length 17.7
  Top Layer w0.254: v1(77.9,8.7) 77.934,8.666 79.166,8.666 U8_MC1.4@79.357,8.475
  Bottom Layer w0.5: v1@78.129,8.543 79.472,7.2 87.8,7.2 89.7,9.1 92.1,9.1 P16_MC1.1@92.7,8.5
NetP16_MC1_2: P16_MC1.2 U8_MC1.6 | length 17.2
  Top Layer w0.5: U8_MC1.6@79.357,7.175 80.356,7.175 80.7,7.519 v1(80.7,7.9)
  Bottom Layer w0.5: v1(80.7,7.9) 80.773,7.827 87.327,7.827 89.4,9.9 93.6,9.9 93.95,9.55 P16_MC1.2@93.95,8.5
NetP16_MC1_3: P16_MC1.3 U8_MC1.9 | length 18.8
  Top Layer w0.5: U8_MC1.9@79.357,5.225 80.406,5.225 80.7,5.519 v1(80.7,6.494)
  Bottom Layer w0.5: v1(80.7,6.494) 80.921,6.273 94.473,6.273 95.2,7 P16_MC1.3@95.2,8.5
NetP16_MC1_4: P16_MC1.4 U8_MC1.7 | length 21.8
  Top Layer w0.5: v1(78.172,6.525) U8_MC1.7@79.357,6.525
  Bottom Layer w0.5: v1(78.172,6.525) 79.051,5.646 94.896,5.646 96.45,7.2 P16_MC1.4@96.45,8.5
NetP16_MC2_1: P16_MC2.1 U8_MC2.4 | length 16
  Top Layer w0.5: v1(39.997,8.681) 40.029,8.649 41.189,8.649 U8_MC2.4@41.257,8.581
  Bottom Layer w0.5: P16_MC2.1@28.125,8.5 28.125,9.725 29.581,11.181 35.279,11.181 37.779,8.681 v1(39.997,8.681)
NetP16_MC2_2: P16_MC2.2 U8_MC2.6 | length 17.1
  Top Layer w0.5: U8_MC2.6@41.257,7.281 42.256,7.281 v1@42.531,7.556 ; v1@42.487,7.6 v1(42.575,7.6)
  Bottom Layer w0.5: P16_MC2.2@29.375,8.5 29.375,9.329 30.6,10.554 35.019,10.554 37.646,7.927 42.16,7.927 v1@42.487,7.6
NetP16_MC2_3: P16_MC2.3 U8_MC2.9 | length 16.9
  Top Layer w0.5: U8_MC2.9@41.257,5.331 42.306,5.331 42.6,5.625 v1(42.6,6.6)
  Bottom Layer w0.5: P16_MC2.3@30.625,8.5 30.625,9.355 31.197,9.927 34.76,9.927 37.387,7.3 41.9,7.3 v1(42.6,6.6)
NetP16_MC2_4: P16_MC2.4 U8_MC2.7 | length 10.8
  Top Layer w0.5: v1(40.072,6.631) U8_MC2.7@41.257,6.631
  Bottom Layer w0.5: P16_MC2.4@31.875,8.5 32.675,9.3 34.5,9.3 37.229,6.571 v1@40.012,6.571
NetR3_2: R3.2 U1.1 U1.19 | length 10.6
  Top Layer w0.254: v1(59.645,27.835) 60.402,27.835 60.867,28.3 v1(66.059,28.3)
  Bottom Layer w0.254: v1(59.645,27.835) 59.915,27.835 60.1,27.65 60.1,26.7 60.4,26.4 U1.19@61.2,26.4 ; v1(66.059,28.3) R3.2@66.225,28.3 ; R3.2@66.55,28.1 66.8,27.85 U1.1@66.8,27.05
NetR11_1: R11.1 U4.4 | length 2.2
  Top Layer w0.254: R11.1@107.65,11.656 107.875,11.881 U4.4@109.727,11.881
NetR14_1: R14.1 U4.5 | length 3.9
  Top Layer w0.254: v1(112.2,11.9) 114.908,11.9 U4.5@114.927,11.881
  Bottom Layer w0.254: R14.1@111.2,11.6 111.9,11.6 v1(112.2,11.9)
NetR16_2: R16.2 U4.8 | length 2.5
  Top Layer w0.254: U4.8@114.927,15.691 116.987,15.691 R16.2@117.277,15.981
NetR24_MC1_2: R24_MC1.2 R27_MC1.2 U8_MC1.5 | length 5.2
  Top Layer w0.5: R24_MC1.2@76.85,8.1 R24_MC1.2@76.847,8.075 ; R27_MC1.2@76.85,9.4 R27_MC1.2@76.847,9.325 ; U8_MC1.5@79.357,7.825 79.351,7.832 78.482,7.832 78.469,7.819 77.653,7.819 77.64,7.832 77.475,7.832 77.469,7.825 77.097,7.825 R24_MC1.2@76.847,8.075 ; R24_MC1.2@76.847,8.075 76.847,8.1 R27_MC1.2@76.847,9.325 ; R24_MC1.2@76.847,8.075 R27_MC1.2@76.847,9.325
NetR24_MC2_2: R24_MC2.2 R27_MC2.2 U8_MC2.5 | length 5.2
  Top Layer w0.5: R24_MC2.2@38.75,8.206 R24_MC2.2@38.747,8.181 ; R27_MC2.2@38.75,9.506 R27_MC2.2@38.747,9.431 ; U8_MC2.5@41.257,7.931 41.251,7.938 40.382,7.938 40.369,7.925 39.932,7.925 39.919,7.938 39.375,7.938 39.369,7.931 38.997,7.931 R24_MC2.2@38.747,8.181 ; R24_MC2.2@38.747,8.181 38.747,8.206 R27_MC2.2@38.747,9.431 ; R24_MC2.2@38.747,8.181 R27_MC2.2@38.747,9.431